# Altium PCB PCB1_VZ.PcbDoc
Units mm, origin at the board's own origin, x right, y up, seen from the top; angles counter-clockwise.
Board outline 69.98 x 50.04 mm, 2 copper layers (Top Layer, Bottom Layer); 12 components, 10 nets, 62 pads, 89 vias.
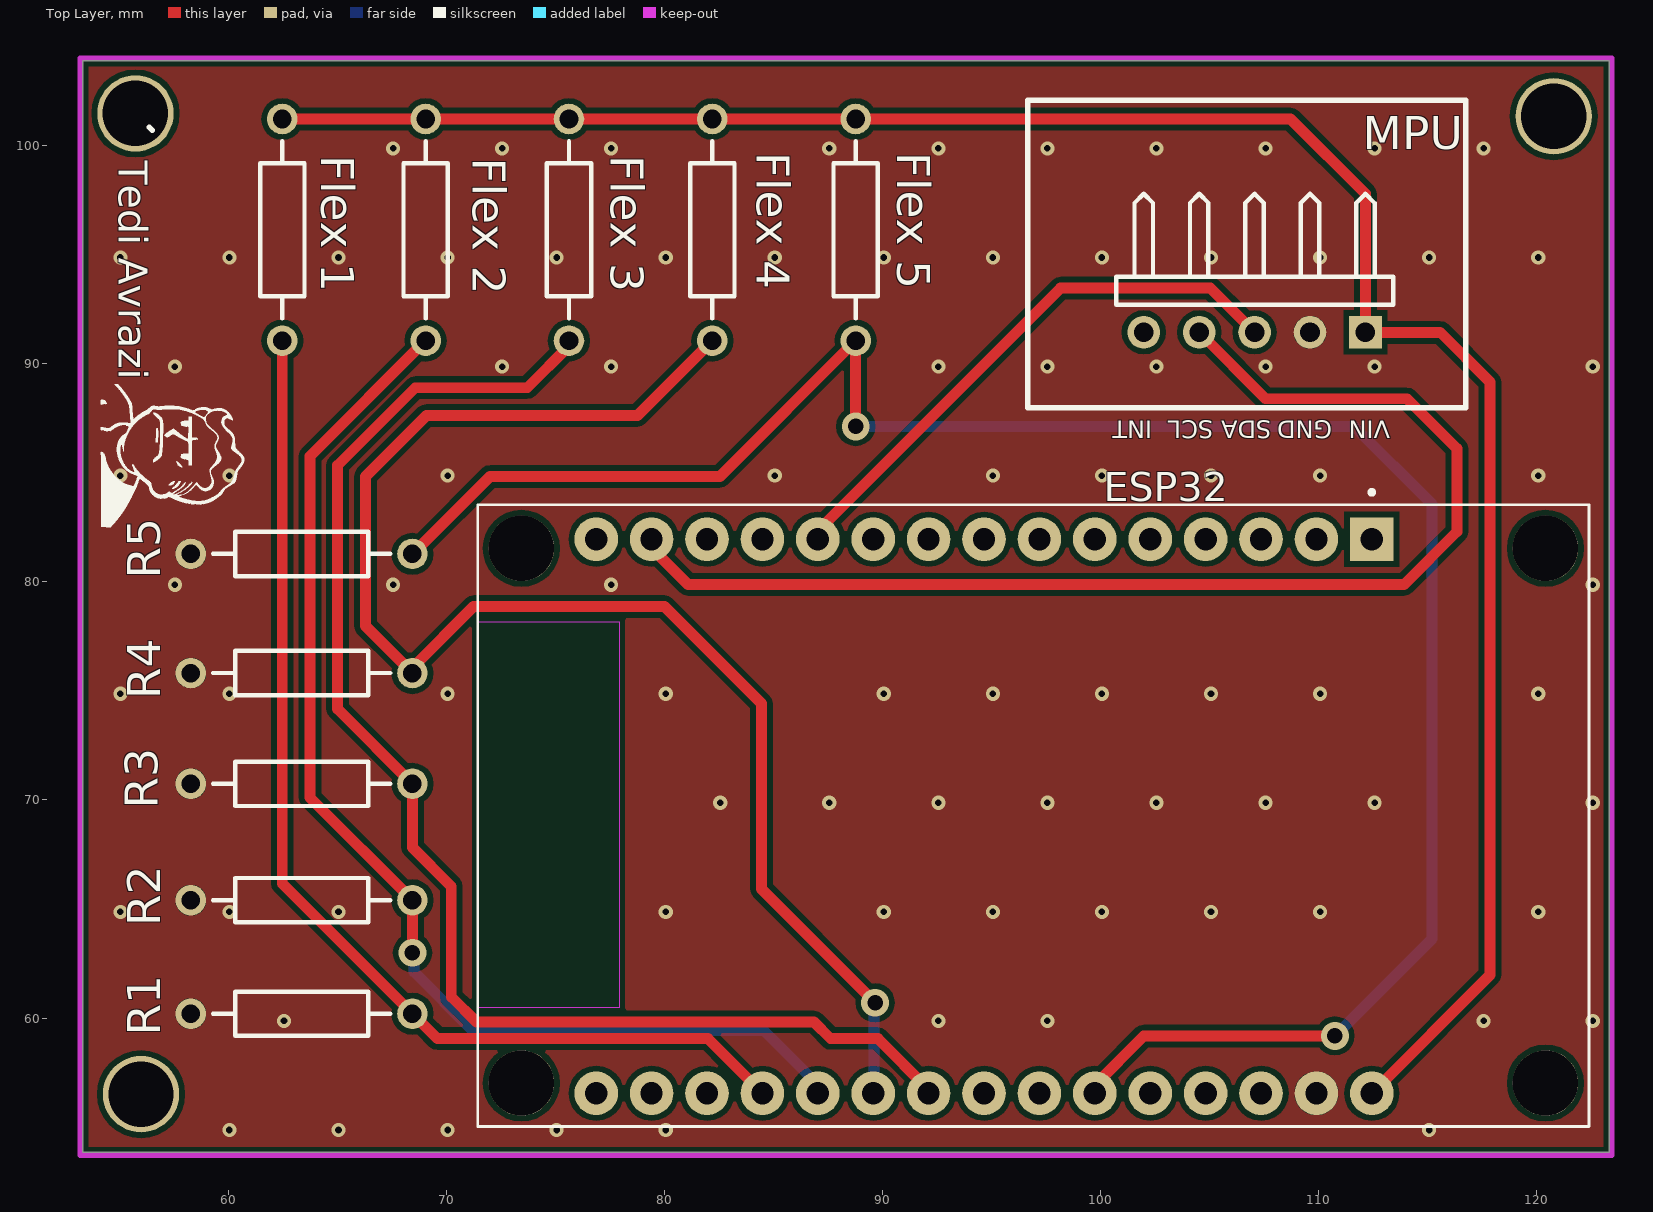
[diagram p0: Top Layer view]
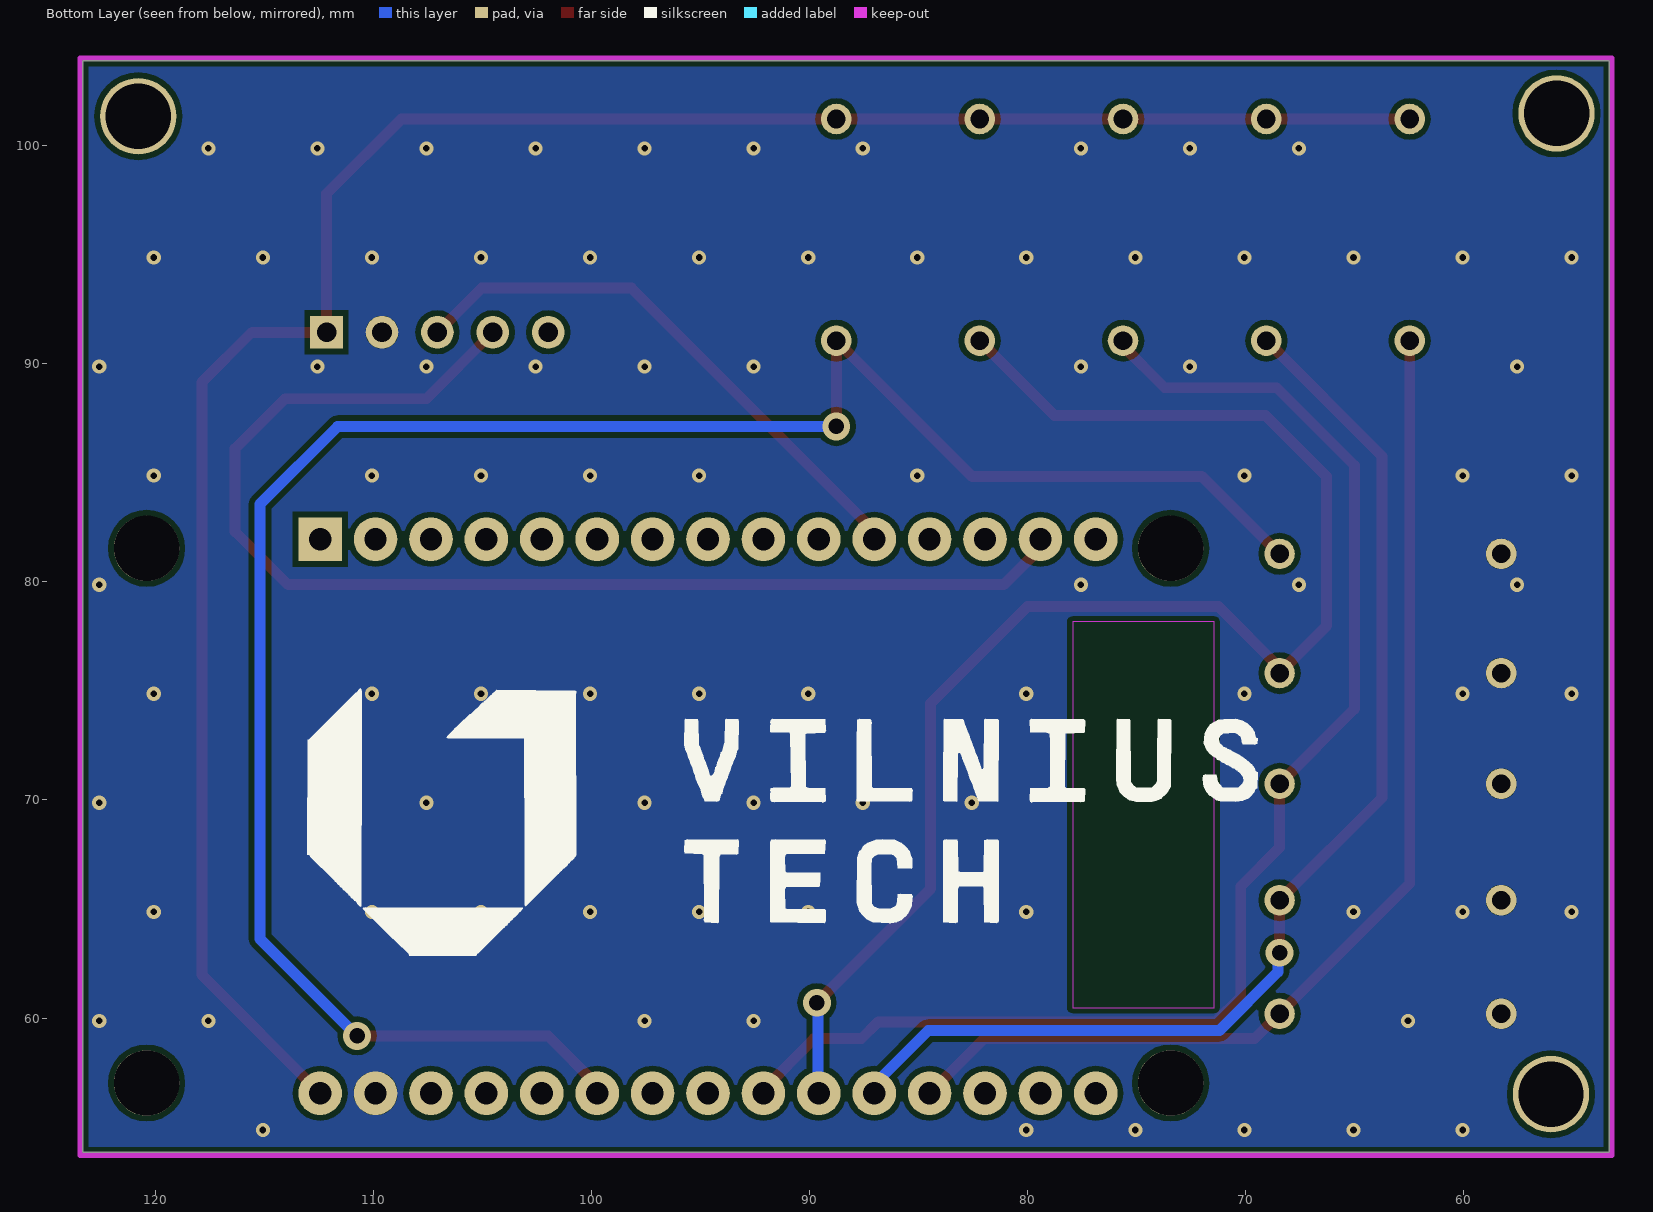
[diagram p1: Bottom Layer view, seen from below]

## Layer stack, top to bottom
Top Solder: solder mask 0.0102, Solder Resist, Dk 3.5
Top Layer: signal copper 0.0356
Dielectric 1: dielectric 0.32, FR-4, Dk 4.8
Bottom Layer: signal copper 0.0356
Bottom Solder: solder mask 0.0102, Solder Resist, Dk 3.5

## Board outline
53.34,53.848 53.34,103.886 123.317,103.886 123.317,53.848

## Design rules (kind name [scope] priority, off if disabled: settings)
Clearance [All] p1: gap=0.254 ignorepadtopadclearanceinfootprint=FALSE except(0: Arc-Hole Track-Hole SMDPad-Hole THPad-Hole Via-Hole Fill-Hole Poly-Hole Region-Hole Text-Hole)
HoleSize [All] p1: absolutevalues=TRUE maxlimit=3 minlimit=0.025 maxpercent=80.000 minpercent=20.000
PolygonConnect [IsVia] p1: connectstyle=Direct reliefconductorwidth=0.254 reliefentries=4 polygonreliefangle="90 Angle" airgapwidth=0.254
RoutingVias [All] p1: holewidth=0.711 width=1.27 viastyle="Through Hole" minholewidth=0.711 minwidth=1.27 maxholewidth=0.711 maxwidth=1.27
SilkToSolderMaskClearance [IsPad] p1: minsilkscreentomaskgap=0.1 clearancetoexposedcopper=TRUE
SolderMaskExpansion [All] p1: expansion=0.102 istentingtop=FALSE
Width [All] p1: maxlimit=0.55 minlimit=0.5 preferedwidth=0.5
28 further rules are at their usual default settings.

## Classes and differential pairs
component class ThesisSchematic: "Power Supply" R1 R3 R4 R5

## Components (designator, comment, footprint, x,y, rotation, side; value= is the part's Value field where it differs from the comment)
ESP32 "ESP32-DEVKIT-V1" MODULE_ESP32_DEVKIT_V1 96.921,69.253 r270 top (schematic designator Microcontroller1)
"Flex 1" "Res Adj2" AXIAL-0.4 62.484,96.139 r90 top
"Flex 2" "Res Adj2" AXIAL-0.4 69.056,96.139 r90 top
"Flex 3" "Res Adj2" AXIAL-0.4 75.629,96.139 r90 top
"Flex 4" "Res Adj2" AXIAL-0.4 82.201,96.139 r90 top
"Flex 5" "Res Adj2" AXIAL-0.4 88.773,96.139 r90 top
MPU "MPU" HDR1X5H 112.141,91.44 r180 top (schematic designator P1)
R1 "Res2" AXIAL-0.4 63.373,60.198 r0 top
R2 "Res2" AXIAL-0.4 63.373,65.405 r0 top
R3 "Res2" AXIAL-0.4 63.373,70.739 r0 top
R4 "Res2" AXIAL-0.4 63.373,75.819 r0 top
R5 "Res2" AXIAL-0.4 63.373,81.28 r0 top

## Footprints (in the part's own frame and the unit in brackets; to place one, negate y for a bottom-side part, rotate by r counter-clockwise, add the part's x,y. Pads: shape width x height; smd on the part's side, far side on the other; paste and mask are expansions set on the pad)
AXIAL-0.4 [mm] "Axial Device, Thru-Hole; 2 Leads; 0.4 in Pin Spacing"
  round 1.4 hole 0.85: 1(-5.08,0) 2(5.08,0)
  silkscreen extent -4.06,-1.02 4.06,1.02
HDR1X5H [mm] "Connector; Header; 5 Position; Right Angle"
  rect 1.5x1.5 hole 0.9: 1(0,0)
  round 1.5 hole 0.9: 2(2.54,0) 3(5.08,0) 4(7.62,0) 5(10.16,0)
  silkscreen extent -1.27,-6.35 11.43,-1.27
MODULE_ESP32_DEVKIT_V1 [mm]
  rect 2x2 hole 1.02: 1(-12.7,15.515)
  round 2 hole 1.02: 2(-12.7,12.975) 3(-12.7,10.435) 4(-12.7,7.895) 5(-12.7,5.355) 6(-12.7,2.815) 7(-12.7,0.275) 8(-12.7,-2.265) 9(-12.7,-4.805) 10(-12.7,-7.345) 11(-12.7,-9.885) 12(-12.7,-12.425) 13(-12.7,-14.965) 14(-12.7,-17.505) 15(-12.7,-20.045) 16(12.7,-20.045) 17(12.7,-17.505) 18(12.7,-14.965) 19(12.7,-12.425) 20(12.7,-9.885) 21(12.7,-7.345) 22(12.7,-4.805) 23(12.7,-2.265) 24(12.7,0.275) 25(12.7,2.815) 26(12.7,5.355) 27(12.7,7.895) 28(12.7,10.435) 29(12.7,12.975) 30(12.7,15.515)
  round 3 hole 3 unplated: ""(-12.28,23.475) ""(-12.28,-23.475) ""(12.23,23.475) ""(12.23,-23.475)
  Keep-Out Layer region: 8.78,-25.475 -8.91,-25.475 -8.91,-18.985 8.78,-18.985
  Keep-Out Layer region: 8.78,-25.475 -8.91,-25.475 -8.91,-18.985 8.78,-18.985
  Keep-Out Layer region: 8.78,-25.475 -8.91,-25.475 -8.91,-18.985 8.78,-18.985
  silkscreen extent -14.95,-25.48 14.23,25.48

## Part data
ESP32: library part CMP-003-000000-1, "Dual core, Wi-Fi: 2.4 GHz up to 150 Mbits/s,BLE (Bluetooth Low Energy) and legacy Bluetooth, 32 bits, Up to 240 MHz"
"Flex 1" "Flex 2": "Flex Sensor 2"
"Flex 3" "Flex 4" "Flex 5": "Variable Resistor"
MPU: library part "Header 5H", "Header, 5-Pin, Right Angle"
R1 R2 R3 R4 R5: "Resistor"

## Free pads (board coordinates)
  round 3.5 hole 3: 1(56.007,56.515) 2(55.753,101.473) 3(120.777,101.346)

## Via types
v1: diameter 0.65, hole 0.3, Top Layer to Bottom Layer, 85 vias
v2: diameter 1.27, hole 0.711, Top Layer to Bottom Layer, 3 vias
v3: diameter 1.27, hole 0.711, Top Layer to Bottom Layer, tented both sides, 1 vias

## Nets (pads, with @x,y where several pads share a name; then routed paths per layer and width w, separated by ;. In a path a pad name is that pad's centre, name@x,y a point inside that pad or via, vN(x,y) a via of type N, cw(c..) or ccw(c..) an arc to the next point about the centre after c; other vN are vias at no path point)
GND: ESP32.29 MPU.2 R1.1 R2.1 R3.1 R4.1 R5.1
  other v1: 60.062,54.869 65.062,54.869 70.062,54.869 75.062,54.869 80.062,54.869 115.062,54.869 62.562,59.869 92.562,59.869 97.562,59.869 117.562,59.869 122.562,59.869 55.062,64.869 60.062,64.869 65.062,64.869 80.062,64.869 90.062,64.869 95.062,64.869 100.062,64.869 105.062,64.869 110.062,64.869 120.062,64.869 82.562,69.869 87.562,69.869 92.562,69.869 97.562,69.869 102.562,69.869 107.562,69.869 112.562,69.869 122.562,69.869 55.062,74.869 60.062,74.869 70.062,74.869 80.062,74.869 90.062,74.869 95.062,74.869 100.062,74.869 105.062,74.869 110.062,74.869 120.062,74.869 57.562,79.869 67.562,79.869 77.562,79.869 122.562,79.869 55.062,84.869 60.062,84.869 70.062,84.869 85.062,84.869 95.062,84.869 100.062,84.869 105.062,84.869 110.062,84.869 120.062,84.869 57.562,89.869 72.562,89.869 77.562,89.869 92.562,89.869 97.562,89.869 102.562,89.869 107.562,89.869 112.562,89.869 122.562,89.869 55.062,94.869 60.062,94.869 65.062,94.869 70.062,94.869 75.062,94.869 80.062,94.869 85.062,94.869 90.062,94.869 95.062,94.869 100.062,94.869 105.062,94.869 110.062,94.869 115.062,94.869 120.062,94.869 67.562,99.869 72.562,99.869 77.562,99.869 87.562,99.869 92.562,99.869 97.562,99.869 102.562,99.869 107.562,99.869 112.562,99.869 117.562,99.869
INT: MPU.5
"NetFlex 1_1": "Flex 1.1" ESP32.19 R1.2 | length 50.9
  Top Layer w0.5: 62.484,91.059 62.484,66.167 R1.2 69.596,59.055 81.994,59.055 ESP32.19
"NetFlex 2_1": "Flex 2.1" ESP32.20 R2.2 | length 54.2
  Top Layer w0.254: ESP32.20@87.016,56.574 ESP32.20
  Top Layer w0.5: v2(68.453,62.992) R2.2 63.754,70.104 63.754,85.757 69.056,91.059
  Bottom Layer w0.5: v2(68.453,62.992) 68.532,62.913 68.532,62.112 71.208,59.436 84.559,59.436 87.036,56.959 ESP32.20
"NetFlex 3_1": "Flex 3.1" ESP32.22 R3.2 | length 63.5
  Top Layer w0.5: 75.629,91.059 75.629,90.815 73.713,88.9 68.58,88.9 65.024,85.344 65.024,74.168 R3.2 68.453,67.818 70.231,66.04 70.231,60.975 71.389,59.817 86.868,59.817 87.63,59.055 89.789,59.055 92.116,56.728 ESP32.22
"NetFlex 4_1": "Flex 4.1" ESP32.21 R4.2 | length 67.7
  Top Layer w0.5: 82.201,91.059 78.772,87.63 69.088,87.63 66.294,84.836 66.294,77.978 R4.2 68.453,76.063 71.257,78.867 80.01,78.867 84.455,74.422 84.455,65.913 v3(89.662,60.706)
  Bottom Layer w0.5: ESP32.21 89.619,56.596 89.619,60.663 v3(89.662,60.706)
"NetFlex 5_1": "Flex 5.1" ESP32.25 R5.2 | length 94.7
  Top Layer w0.5: R5.2 72.009,84.836 82.55,84.836 88.773,91.059 v2(88.773,87.122) ; ESP32.25 99.736,56.937 101.981,59.182 v2(110.744,59.182)
  Bottom Layer w0.5: v2(88.773,87.122) 111.633,87.122 115.189,83.566 115.189,63.627 v2(110.744,59.182)
SCL: ESP32.14 MPU.4 | length 56.8
  Top Layer w0.5: ESP32.14 79.416,81.547 81.08,79.883 113.919,79.883 116.332,82.296 116.332,86.106 114.046,88.392 107.569,88.392 MPU.4
SDA: ESP32.11 MPU.3 | length 25.9
  Top Layer w0.5: ESP32.11 87.036,82.337 98.171,93.472 105.029,93.472 MPU.3
VIN: "Flex 1.2" "Flex 2.2" "Flex 3.2" "Flex 4.2" "Flex 5.2" ESP32.30 MPU.1 | length 98.9
  Top Layer w0.5: 62.484,101.219 69.056,101.219 75.629,101.219 82.201,101.219 88.773,101.219 108.712,101.219 112.141,97.79 MPU.1 115.57,91.44 117.856,89.154 117.856,61.973 ESP32.30
pads on no net: ESP32. ESP32.1 ESP32.2 ESP32.3 ESP32.4 ESP32.5 ESP32.6 ESP32.7 ESP32.8 ESP32.9 ESP32.10 ESP32.12 ESP32.13 ESP32.15 ESP32.16 ESP32.17 ESP32.18 ESP32.23 ESP32.24 ESP32.26 ESP32.27 ESP32.28

## Polygon pours and split planes (outlines as drawn)
GND on Top Layer "GND_L01_P002" (solid, pour order 2): 53.594,103.886 53.34,103.632 53.34,53.848 123.317,53.848 123.317,103.886
GND on Bottom Layer "GND_L02_P003" (solid, pour order 3): 53.594,103.886 53.34,103.632 53.34,53.848 123.317,53.848 123.317,103.886

## Keep-outs
Keep-Out Layer:
  lines w0.254: 53.213,53.721 53.213,104.013 123.444,104.013 123.444,53.721 53.213,53.721

## Silkscreen, mask and mechanical layers (free items; w line width, h text height)
Top Overlay:
  drawing of 13 lines, arcs and shapes, not listed
  text "Tedi Avrazi" at 54.991,99.314 h1.32 r270
  text "INT" at 102.362,87.376 h0.8 r180
  text "SCL" at 105.156,87.376 h0.8 r180
  text "SDA" at 107.823,87.376 h0.8 r180
  text "GND" at 110.617,87.376 h0.8 r180
  text "VIN" at 113.284,87.376 h0.8 r180
Bottom Overlay:
  drawing of 14 lines, arcs and shapes, not listed
Mechanical 1:
  lines w0.013: 112.713,87.981 116.713,87.981 ; 114.713,87.981 116.713,87.981 ; 116.713,87.981 116.713,101.981 96.713,101.981 96.713,87.981 116.713,87.981